# Altium PCB LCD_PCB_LAYOUT_1.PcbDoc
Units mil, origin at the board's own origin, x right, y up, seen from the top; angles counter-clockwise.
Board outline 2820 x 2535 mil, 2 copper layers (Top Layer, Bottom Layer); 24 components, 23 nets, 87 pads, 0 vias.
Unrouted connection lines stored in the file: 11.
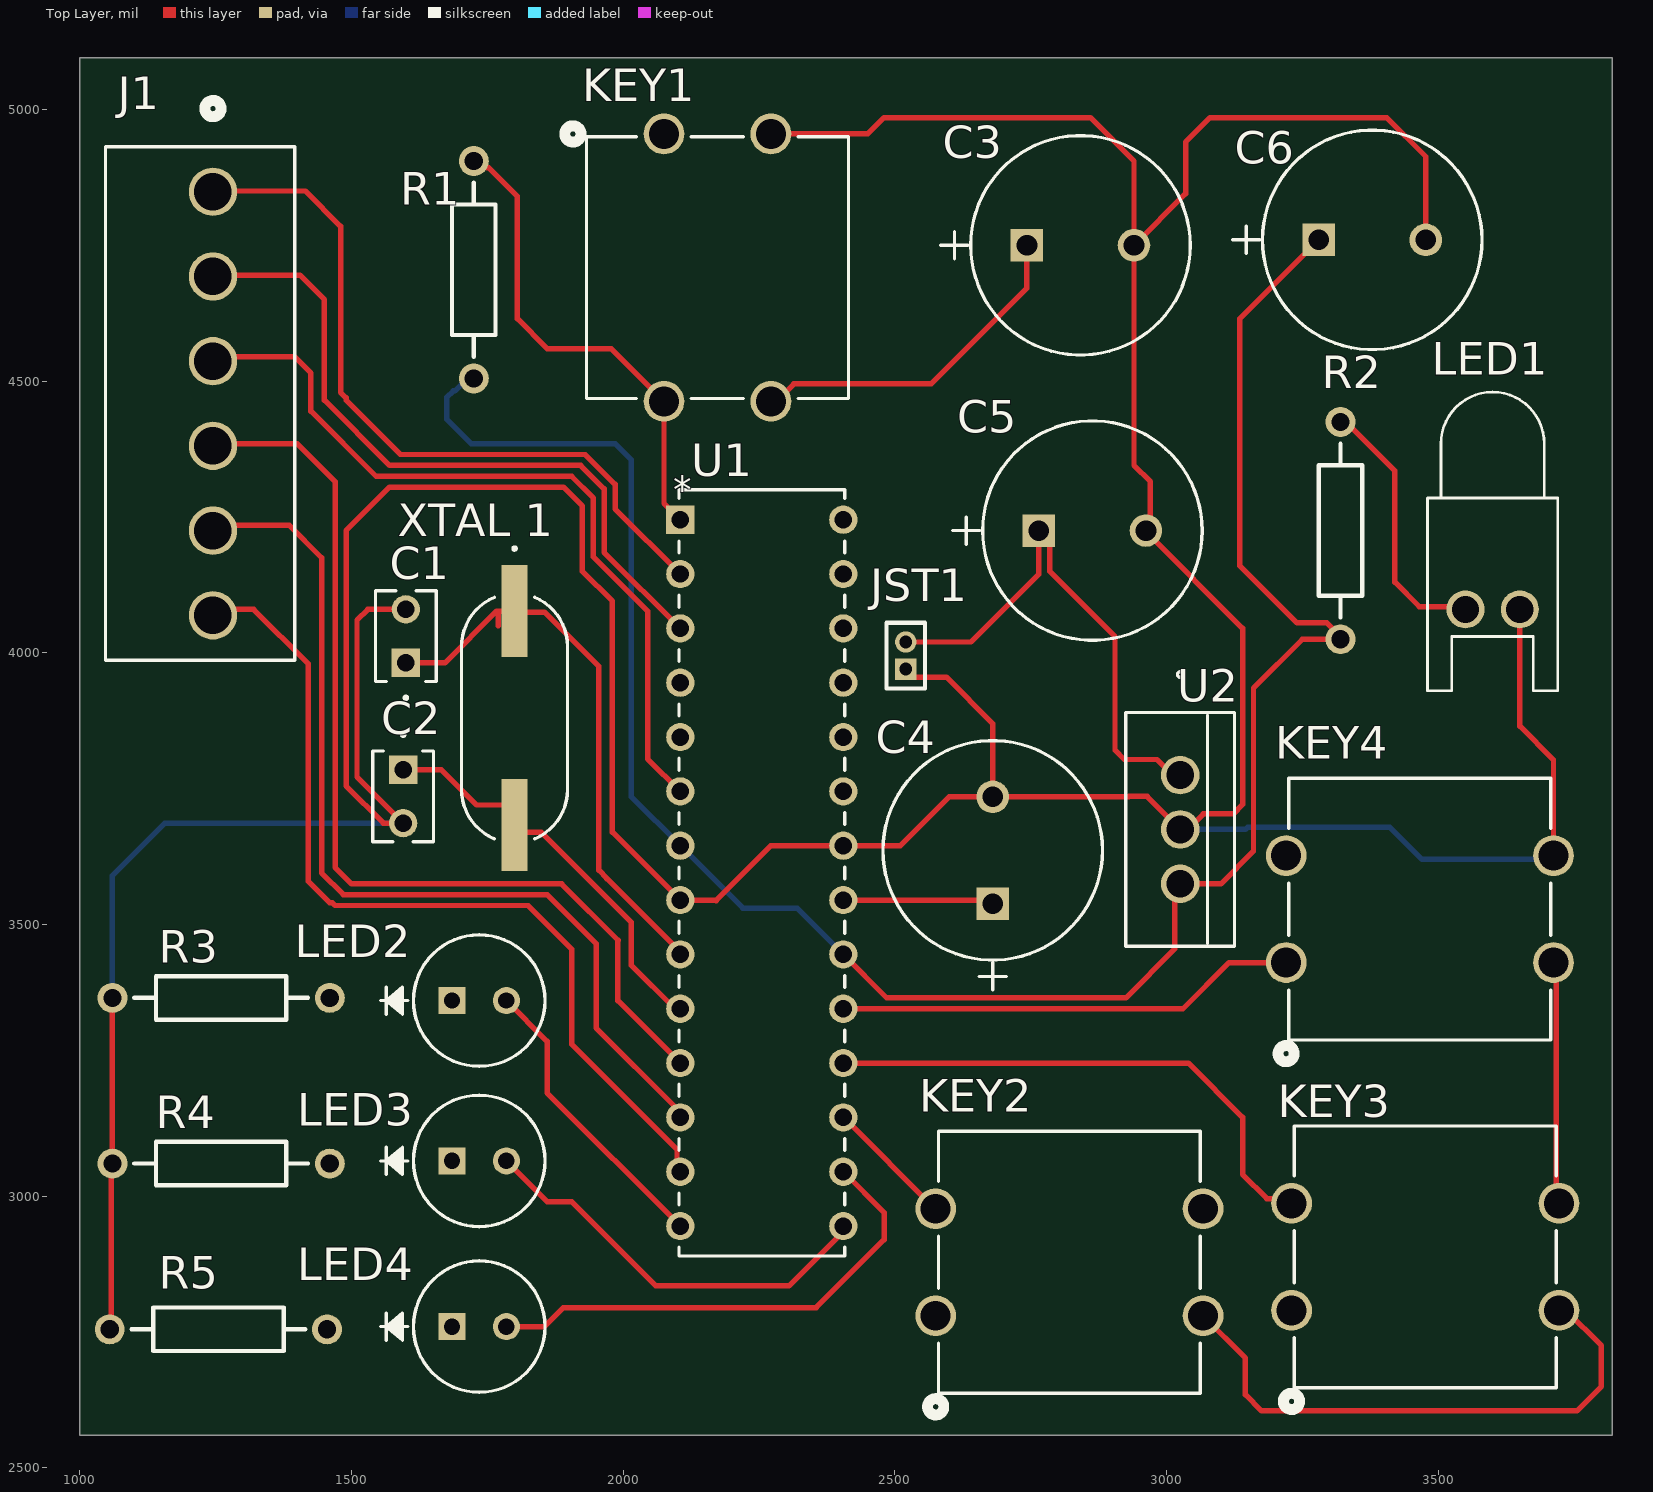
[diagram p0: Top Layer view]
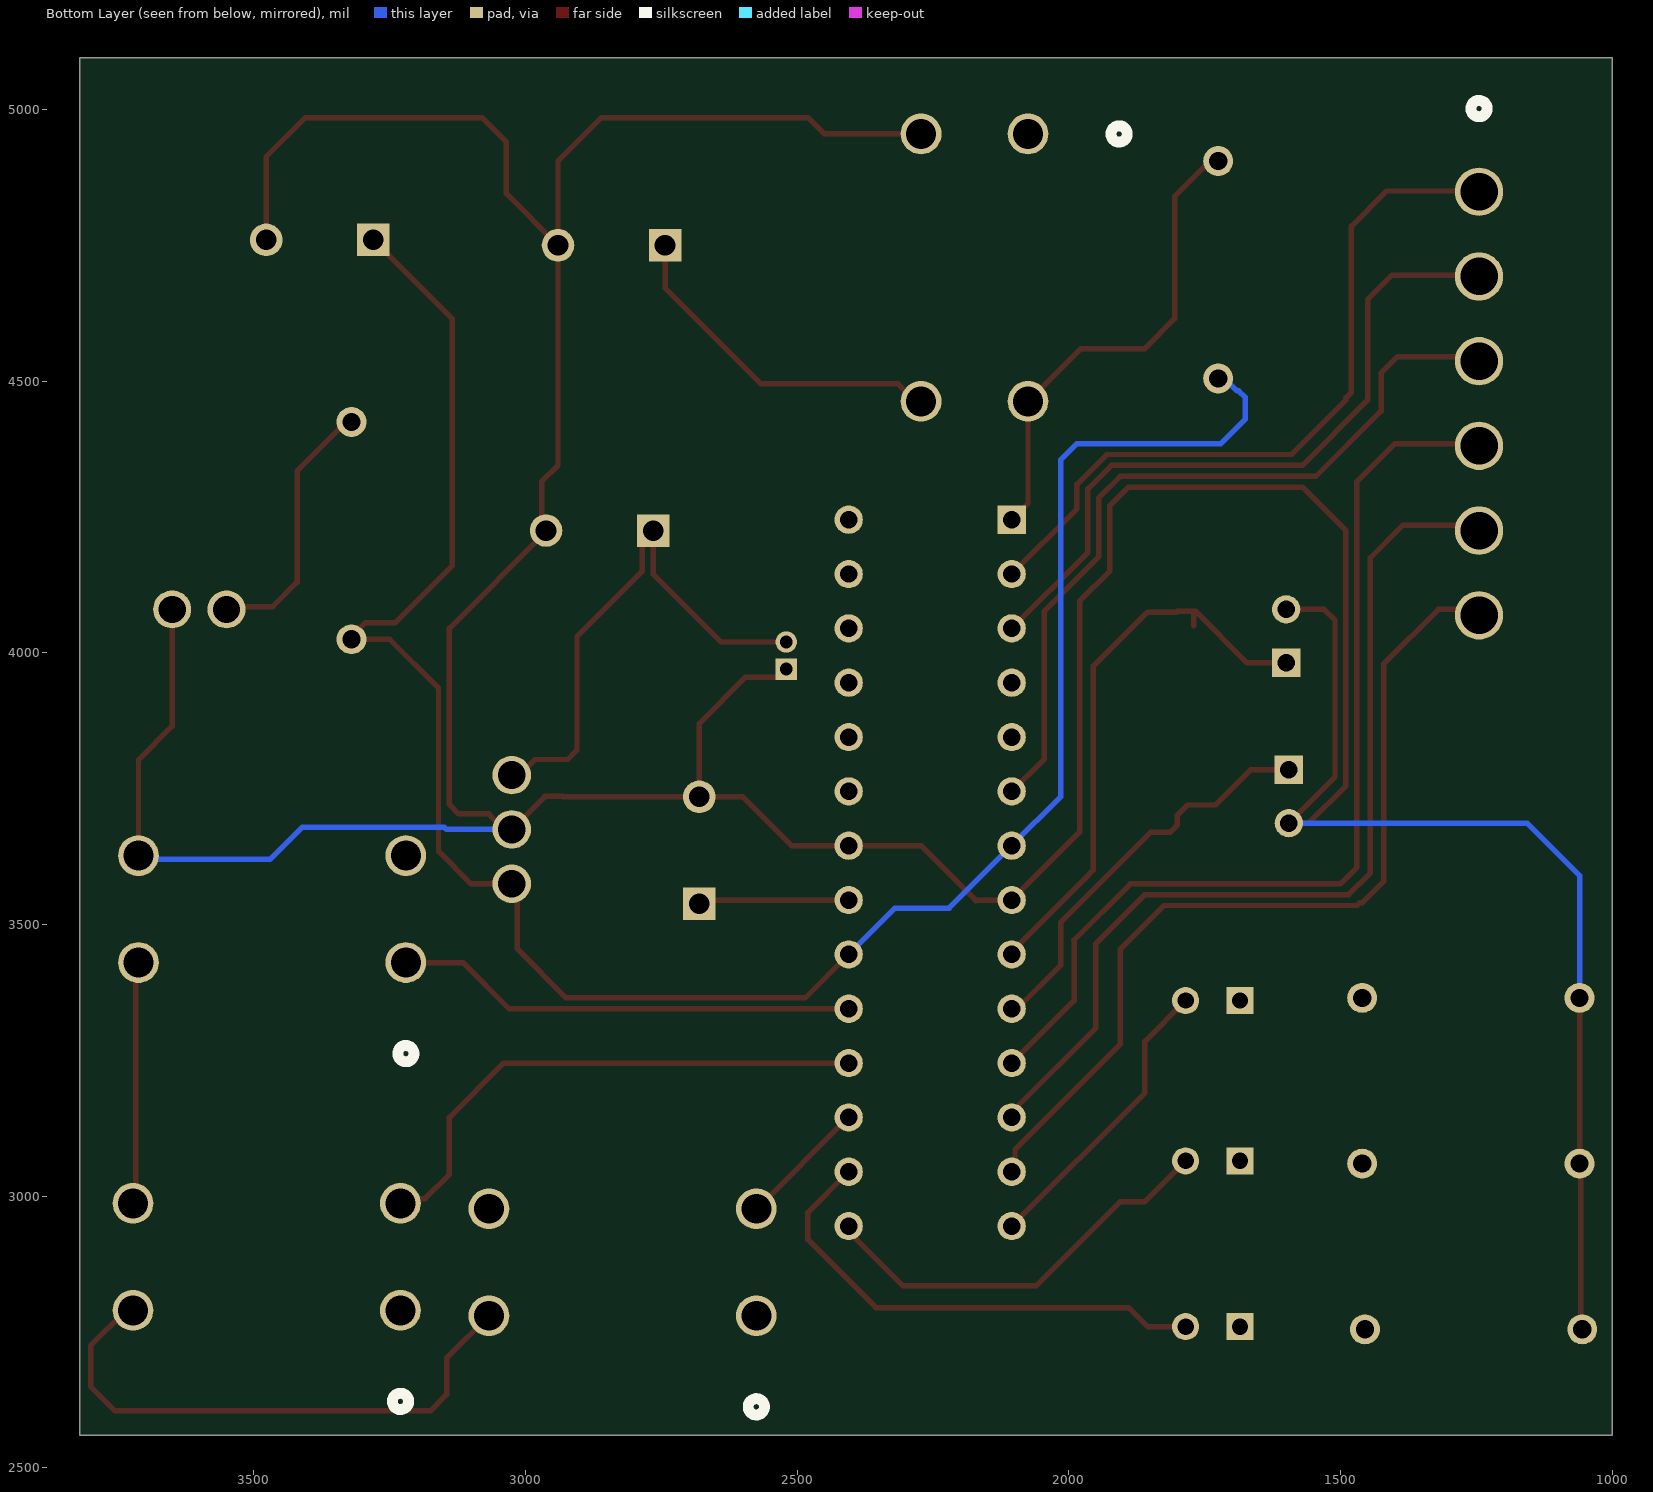
[diagram p1: Bottom Layer view, seen from below]

## Layer stack, top to bottom
Top Solder: solder mask 0.4, Solder Resist, Dk 3.5
Top Layer: signal copper 1.4
Dielectric 1: dielectric 12.6, FR-4, Dk 4.8
Bottom Layer: signal copper 1.4
Bottom Solder: solder mask 0.4, Solder Resist, Dk 3.5

## Board outline
1000,2560 3820,2560 3820,5095 1000,5095

## Design rules (kind name [scope] priority, off if disabled: settings)
Clearance [All] p1: gap=10 ignorepadtopadclearanceinfootprint=FALSE except(0: Arc-Hole Track-Hole SMDPad-Hole THPad-Hole Via-Hole Fill-Hole Poly-Hole Region-Hole Text-Hole)
PolygonConnect [All] p1: connectstyle=Relief reliefconductorwidth=10 reliefentries=4 polygonreliefangle="90 Angle" airgapwidth=10
RoutingVias [All] p1: holewidth=28 width=50 viastyle="Through Hole" minholewidth=28 minwidth=50 maxholewidth=28 maxwidth=50
SolderMaskExpansion [All] p1: expansion=4 istentingtop=FALSE
Width [All] p1: maxlimit=10 minlimit=10 preferedwidth=10
30 further rules are at their usual default settings.

## Components (designator, comment, footprint, x,y, rotation, side; value= is the part's Value field where it differs from the comment)
C1 "22pF" CAP_K220J15C0GF53L2_VIS#1 1600,3981.57 r90 top
C2 "22pF" CAP_K220J15C0GF53L2_VIS#2 1595,3785 r270 top
C3 "100nF" PCAP_10x16_PAN 2743,4750 r0 top
C4 "100nF" PCAP_10x16_PAN 2680,3538 r90 top
C5 "330nF" PCAP_10x16_PAN 2765,4225 r0 top
C6 "100nF" PCAP_10x16_PAN 3280,4760 r0 top
J1 "6 pin female connector" CONN6_1744055-6 1245,4848.62 r270 top
JST1 "" MHDR1X2 2520,3970 r90 top
KEY1 "RESET" TL1100F 2075,4955 r0 top
KEY2 "RED" TL1100F 2575,2780 r90 top
KEY3 "BLUE" TL1100F 3230,2790 r90 top
KEY4 "GREEN" TL1100F 3220,3430 r90 top
LED1 "5mm LED" LED-0 3600,4080 r180 top
LED2 "red_led" LED_SSL-LX5093BID_LUM 1685,3360 r0 top
LED3 "blue_led" LED_SSL-LX5093BID_LUM 1685,3065 r0 top
LED4 "green_led" LED_SSL-LX5093BID_LUM 1685,2760 r0 top
R1 "10K" AXIAL-0.4 1725,4705 r270 top
R2 "330K" AXIAL-0.4 3320,4225 r90 top
R3 "10K" AXIAL-0.4 1260,3365 r0 top
R4 "10K" AXIAL-0.4 1260,3060 r0 top
R5 "10K" AXIAL-0.4 1255,2755 r0 top
U1 "ATMEGA328-PU" 28P3_SPDIP28_SP_MCH 2105,4245 r0 top
U2 "7805" TO-220_FAS 3025,3775 r270 top
"XTAL 1" "16MHz" SMD_ABLS_11P4X4P7_ABR 1800,3880 r270 top

## Footprints (in the part's own frame and the unit in brackets; to place one, negate y for a bottom-side part, rotate by r counter-clockwise, add the part's x,y. Pads: shape width x height; smd on the part's side, far side on the other; paste and mask are expansions set on the pad)
28P3_SPDIP28_SP_MCH [mil]
  rect 52x52 hole 32 mask+0: 1(0,0)
  round 52 hole 32 mask+0: 2(0,-100) 3(0,-200) 4(0,-300) 5(0,-400) 6(0,-500) 7(0,-600) 8(0,-700) 9(0,-800) 10(0,-900) 11(0,-1000) 12(0,-1100) 13(0,-1200) 14(0,-1300) 15(300,-1300) 16(300,-1200) 17(300,-1100) 18(300,-1000) 19(300,-900) 20(300,-800) 21(300,-700) 22(300,-600) 23(300,-500) 24(300,-400) 25(300,-300) 26(300,-200) 27(300,-100) 28(300,0)
  silkscreen extent -2,-1355 302,55, body extent 0,0 10,10, height 10
AXIAL-0.4 [mm] "Axial Device, Thru-Hole; 2 Leads; 0.4 in Pin Spacing"
  round 1.4 hole 0.85: 1(-5.08,0) 2(5.08,0)
  silkscreen extent -4.06,-1.02 4.06,1.02
CAP_K220J15C0GF53L2_VIS#1 [mil]
  rect 52x52 hole 32 mask+0: 1(0,0)
  round 52 hole 32 mask+0: 2(98.43,0)
  silkscreen extent -67,-56 133,56, body extent 0,0 10,10, height 10
CAP_K220J15C0GF53L2_VIS#2 [mil]
  rect 52x52 hole 32 mask+0: 1(0,0)
  round 52 hole 32 mask+0: " "(98.43,0)
  silkscreen extent -67,-56 133,56, body extent 0,0 10,10, height 10
CONN6_1744055-6 [mil]
  round 89 hole 69 mask+0: 1(0,0) 2(155.91,0) 3(311.81,0) 4(467.72,0) 5(623.62,0) 6(779.53,0)
  silkscreen extent -168,-198 862,151, body extent 0,0 10,10, height 10
LED-0 [mil] "LED; 2 Leads"
  round 70 hole 50: 1(50,0) 2(-50,0)
  silkscreen extent -120,-400 120,150
LED_SSL-LX5093BID_LUM [mil]
  rect 50x50 hole 30 mask+0: 1(0,0)
  round 50 hole 30 mask+0: 2(100,0)
  silkscreen extent -131,-121 171,121, body extent 0,0 10,10, height 10
MHDR1X2 [mm] "Connector; Header; 2 Position"
  rect 1x1 hole 0.6: 1(0,0)
  round 1 hole 0.6: 2(1.27,0)
  silkscreen extent -0.9,-0.9 2.17,0.9
PCAP_10x16_PAN [mil]
  rect 60x60 hole 38 mask+0: 1(0,0)
  round 60 hole 38 mask+0: 2(197,0)
  silkscreen extent -158,-202 300,202, body extent 0,0 10,10, height 10
SMD_ABLS_11P4X4P7_ABR [mil]
  rect 169.75x47.75 smd paste+0 mask+0: 1(-196.81,0) 2(196.81,0)
  silkscreen extent -315,-98 222,98, body extent 0,0 10,10, height 10
TL1100F [mil]
  round 75 hole 55 mask+0: 1(0,0) 2(0,-492.13) 3(196.85,0) 4(196.85,-492.13)
  silkscreen extent -183,-487 339,15, body extent 0,0 10,10, height 10
TO-220_FAS [mil]
  round 71 hole 51 mask+0: 1(0,0) 2(100,0) 3(200,0)
  silkscreen extent -190,-100 315,100, body extent 0,0 10,10, height 10

## Part data
C1 C2: library part K220J15C0GF53L2, "No Description Available", Built_By=EMA_Cory, Copyright="Copyright (C) 2018 Accelerated Designs. All rights reserved", Datasheet=https://www.mouser.com/datasheet/2/427/kseries-1763315.pdf, Manufacturer_Part_Number=K220J15C0GF53L2, RefDes=RefDes, SourceLibrary=Vishay_2020-06-24, Type=DEV, Vendor=Vishay
C3 C4 C5 C6: library part ECA2GM4R7, "No Description Available", Built_By=EMA_UL_Team, Copyright="Copyright (C) 2018 Accelerated Designs. All rights reserved", Manufacturer_Part_Number=ECA2GM4R7, RefDes=RefDes, SourceLibrary=Panasonic_2011-12-05_Caps_NHG, Type=DEV, Vendor=Panasonic
J1: library part 1744055-6, "3.96 EP HDR ASSY 6P VERT HT", Built_By=EMA_UL_Team, Copyright="Copyright (C) 2016 Accelerated Designs. All rights reserved", Datasheet=https://www.te.com/commerce/DocumentDelivery/DDEController?Action=srchrtrv&DocNm=1744055&DocType=Customer+Drawing&DocLang=English&DocFormat=pdf&PartCntxt=1744055-2, Manufacturer_Part_Number=1744055-6, PITCH(MM)=3.96, POSITIONS=6, PRODUCT=Connector, RefDes=RefDes, ROWS/CONFIG=1, SourceLibrary=TE_Connectivity_250_Part_Delivery_6_2018-09-18, TE_Part_Number=1744055-6, Type=DEV, Vendor="TE Connectivity"
JST1: library part MHDR1X2, "Header, 2-Pin", LatestRevisionDate=17-Jul-2002, LatestRevisionNote="Re-released for DXP Platform.", Publisher="Altium Limited"
KEY1 KEY2 KEY3 KEY4: library part TL1100FF160Q, "No Description Available", Built_By=EMA_Cory, Copyright="Copyright (C) 2018 Accelerated Designs. All rights reserved", Datasheet=https://sten-eswitch-13110800-production.s3.amazonaws.com/system/asset/product_line/data_sheet/143/TL1100.pdf, Manufacturer_Part_Number=TL1100FF160Q, RefDes=RefDes, SourceLibrary=E-Switch_2020-03-31, Type=DEV, Vendor=E-Switch
LED1: library part LED0, "Typical INFRARED GaAs LED", LatestRevisionDate=08-Jul-2005, LatestRevisionNote="Mech Layer 1 removed.", PackageDescription="LED; 2 Leads", PackageReference=LED-0, Published=8-Jun-2000, Publisher="Altium Limited"
LED2 LED3 LED4: library part SSL-LX5093BID, "No Description Available", Built_By=EMA_Cory, Copyright="Copyright (C) 2018 Accelerated Designs. All rights reserved", Datasheet=https://www.mouser.com/datasheet/2/244/SSL-LX5093BID-1137540.pdf, Manufacturer_Part_Number=SSL-LX5093BID, RefDes=RefDes, SourceLibrary=Add_to_database_2021-04-19, Type=DEV, Vendor=Lumex
R1 R2 R3 R4 R5: library part Res2, "Resistor", LatestRevisionDate=17-Jul-2002, LatestRevisionNote="Re-released for DXP Platform.", PackageDescription="Axial Device, Thru-Hole; 2 Leads; 0.4 in Pin Spacing", PackageReference=AXIAL-0.4, Published=8-Jun-2000, Publisher="Altium Limited"
U1: library part ATMEGA328-PU_1, "No Description Available", Built_By=EMA_Cory, Copyright="Copyright (C) 2018 Accelerated Designs. All rights reserved", Datasheet=https://ww1.microchip.com/downloads/en/DeviceDoc/ATmega48A-PA-88A-PA-168A-PA-328-P-DS-DS40002061B.pdf, Manufacturer_Part_Number=ATMEGA328-PU, RefDes=RefDes, SourceLibrary=Update_to_database_2021-05-13, Type=DEV, Vendor=Microchip
U2: library part LM7805CT, "No Description Available", Built_By=EMA_UL_Team, Copyright="Copyright (C) 2018 Accelerated Designs. All rights reserved", Manufacturer_Part_Number=LM7805CT, RefDes=RefDes, SourceLibrary=Fairchild_2008-01-01_, Type=DEV, Vendor="Fairchild Semiconductor"
"XTAL 1": library part ABLS-16.000MHZ-B4-T, "No Description Available", Built_By=EMA_Anthony, Copyright="Copyright (C) 2018 Accelerated Designs. All rights reserved", Datasheet=https://abracon.com/Resonators/abls.pdf, Manufacturer_Part_Number=ABLS-16.000MHZ-B4-T, RefDes=RefDes, SourceLibrary=Add_to_database_2021-04-09, Type=DEV, Vendor=Abracon

## Nets (pads, with @x,y where several pads share a name; then routed paths per layer and width w, separated by ;. In a path a pad name is that pad's centre, name@x,y a point inside that pad or via, vN(x,y) a via of type N, cw(c..) or ccw(c..) an arc to the next point about the centre after c; other vN are vias at no path point)
+5: C6.1 R1.2 R2.1 U1.7 U1.20 U2.3 | length 3971.3
  Top Layer w10: U1.20 2485,3365 2925,3365 3015,3455 3015,3565 U2.3 3100,3575 3160,3635 3160,3935 3250,4025 R2.1 3320,4030 3295,4055 3240,4055 3135,4160 3135,4615 C6.1
  Bottom Layer w10: R1.2 1712.79,4505 1690.02,4482.22 1687.22,4482.22 1675,4470 1675,4430 1720,4385 1985,4385 2015,4355 2015,3735 U1.7 2220,3530 2320,3530 U1.20
BLUE_BUTTON: KEY3.1 KEY3.3 U1.18 | length 993.4
  Top Layer w10: U1.18 3040,3245 3140,3145 3140,3040 3184.45,2995.55 3221.3,2995.55 KEY3.3
BLUE_LED: LED3.2 U1.15 | length 766.7
  Top Layer w10: LED3.2 1860,2990 1905,2990 2060,2835 2305,2835 2405,2935 U1.15
D4: J1.3 U1.6 | length 1458.4
  Top Layer w10: J1.3 1253.19,4545 1395,4545 1425,4515 1425,4445 1545,4325 1905,4325 1945,4285 1945,4176.72 2045,4076.72 2045,3805 U1.6
D5: J1.4 U1.11 | length 1816
  Top Layer w10: J1.4 1249.09,4385 1400,4385 1470,4315 1470,3605 1500,3575 1886.72,3575 1990.86,3470.86 1990,3470 1990,3360 U1.11
D6: J1.5 U1.12 | length 1753.8
  Top Layer w10: J1.5 1255,4235 1385,4235 1445,4175 1445,3595 1485,3555 1860,3555 1950,3465 1950,3310 2096.28,3163.72 2096.28,3158 2094.14,3155.86 U1.12
D7: J1.6 U1.13 | length 1650.6
  Top Layer w10: J1.6 1255.91,4080 1320,4080 1420,3980 1420,3580 1460,3540 1465,3540 1470,3535 1825,3535 1905,3455 1905,3280 2099,3086 2099,3051 U1.13
E: J1.2 U1.3 | length 1306.9
  Top Layer w10: J1.2 1247.28,4695 1405,4695 1450,4650 1450,4465 1570,4345 1921.72,4345 1965,4301.72 1965,4185 U1.3
GND: "C2. " C1.2 C3.2 C4.2 C5.2 C6.2 JST1.1 KEY1.1 KEY1.3 KEY2.2 KEY2.4 KEY3.2 KEY3.4 KEY4.2 KEY4.4 LED1.2 R3.1 R4.1 R5.1 U1.8 U1.22 U2.2 | length 10845.7
  Top Layer w10: R5.1 1055,2760 1057.5,2762.5 1057.5,3057.5 R4.1 R3.1 ; C1.2 1530,4080 1510,4060 1510,3771.57 1595,3686.57 1558.43,3686.57 1490,3755 1490,4225 1570,4305 1890,4305 1925,4270 1925,4150 1980,4095 1980,3670 U1.8 2170,3545 2170.86,3544.14 2271.72,3645 U1.22 2510,3645 2600,3735 C4.2 ; KEY1.3 2450,4955 2480,4985 2860,4985 2940,4905 C3.2 ; JST1.1 2534.69,3955.31 2594.69,3955.31 2680,3870 C4.2 ; KEY2.2 3145,2702.13 3145,2635 3175,2605 3755,2605 3800,2650 3800,2725 3735,2790 KEY3.2 ; C6.2 3477,4913 3405,4985 3080,4985 3035,4940 3035,4845 C3.2 ; LED1.2 3650,3865 3712.13,3802.87 KEY4.4 ; KEY4.2 3717.13,3425 3717.13,2991.85 KEY3.4 ; C4.2 2930,3735 2930.86,3735.86 2964.14,3735.86 U2.2 3038.89,3675 3067.65,3703.76 3122.91,3703.76 3140,3720.86 3140,4045 2962,4223 C5.2 2970,4233 2970,4315 2940,4345 C3.2
  Bottom Layer w10: R3.1 1060,3590 1156.57,3686.57 1391.03,3686.57 1595,3686.57 ; U2.2 3145.29,3675 3149.64,3679.35 3410.65,3679.35 3470,3620 3705.28,3620 KEY4.4
GREEN_BUTTON: KEY4.1 KEY4.3 U1.19 | length 850.2
  Top Layer w10: U1.19 3030,3345 3115,3430 KEY4.1
GREEN_LED: LED4.2 U1.16 | length 917.3
  Top Layer w10: LED4.2 1855,2760 1890,2795 2355,2795 2480,2920 2480,2970 U1.16
NetC1_1: "XTAL 1.1" C1.1 U1.9 | length 1048.8
  Top Layer w10: C1.1 1671.57,3981.57 1766.81,4076.81 1800,4076.81 1801.81,4075 1855,4075 1955,3975 1955,3600 1970,3585 1970,3584.57 2105,3449.57 U1.9 ; 1770,4050 1770,4070
NetC2_1: "XTAL 1.2" C2.1 U1.10 | length 749.1
  Top Layer w10: C2.1 1665,3785 1730,3720 1781.13,3720 1800,3701.13 1800,3683.19 1813.19,3670 1849.14,3670 1855,3664.14 2015,3504.14 2015,3425 2095,3345 U1.10
NetC3_1: C3.1 KEY1.2 KEY1.4 R1.1 U1.1 | length 1531.4
  Top Layer w10: R1.1 1737.21,4905 1749.8,4892.41 1752.59,4892.41 1805,4840 1805,4615 1860,4560 1977.87,4560 KEY1.2 2075,4275 U1.1 ; KEY1.4 2281.84,4462.87 2313.97,4495 2566.73,4495 2743,4671.27 C3.1
NetC4_1: C4.1 U1.21 | length 277.9
  Top Layer w10: U1.21 2673,3545 C4.1
NetLED1_1: LED1.1 R2.2 | length 493
  Top Layer w10: R2.2 3330,4425 3420,4335 3420,4130 3465,4085 3545,4085 LED1.1
NetLED2_1: LED2.1 R3.2
NetLED3_1: LED3.1 R4.2
NetLED4_1: LED4.1 R5.2
RED_BUTTON: KEY2.1 KEY2.3 U1.17 | length 239.6
  Top Layer w10: U1.17 2405.93,3145 2574.07,2976.85 KEY2.3
RED_LED: LED2.2 U1.14 | length 547.5
  Top Layer w10: LED2.2 1860,3285 1860,3190 U1.14
RS: J1.1 U1.2 | length 1360.5
  Top Layer w10: J1.1 1246.38,4850 1415,4850 1480,4785 1480,4479.14 1490,4469.14 1490,4465 1590,4365 1930,4365 1985,4310 1985,4265 U1.2
VCC: C5.1 JST1.2 U2.1 | length 977.9
  Top Layer w10: JST1.2 2640,4020 2765,4145 C5.1 2785,4205 2785,4150 2905,4030 2905,3820.86 2922.09,3803.76 2982.35,3803.76 3011.11,3775 U2.1
pads on no net: U1.4 U1.5 U1.23 U1.24 U1.25 U1.26 U1.27 U1.28

## Text inside footprints (layer, text, board x,y; h text height)
U1: Top Overlay "*" at 2092.5,4276 h50; Mechanical 13 "*" at 2105,4220 h50
U2: Mechanical 13 "TAB" at 3082.58,3693.75 h25 r270